# Altium PCB STM32_DEVBOARD_V1.1.PcbDoc (part 1 of 2)
Units mm, origin at the board's own origin, x right, y up, seen from the top; angles counter-clockwise.
Board outline 38.6 x 103 mm, 4 copper layers (Top Layer, Mid-Layer 1, Mid-Layer 2, Bottom Layer); 59 components, 115 nets, 379 pads, 250 vias.
Unrouted connection lines stored in the file: 6.
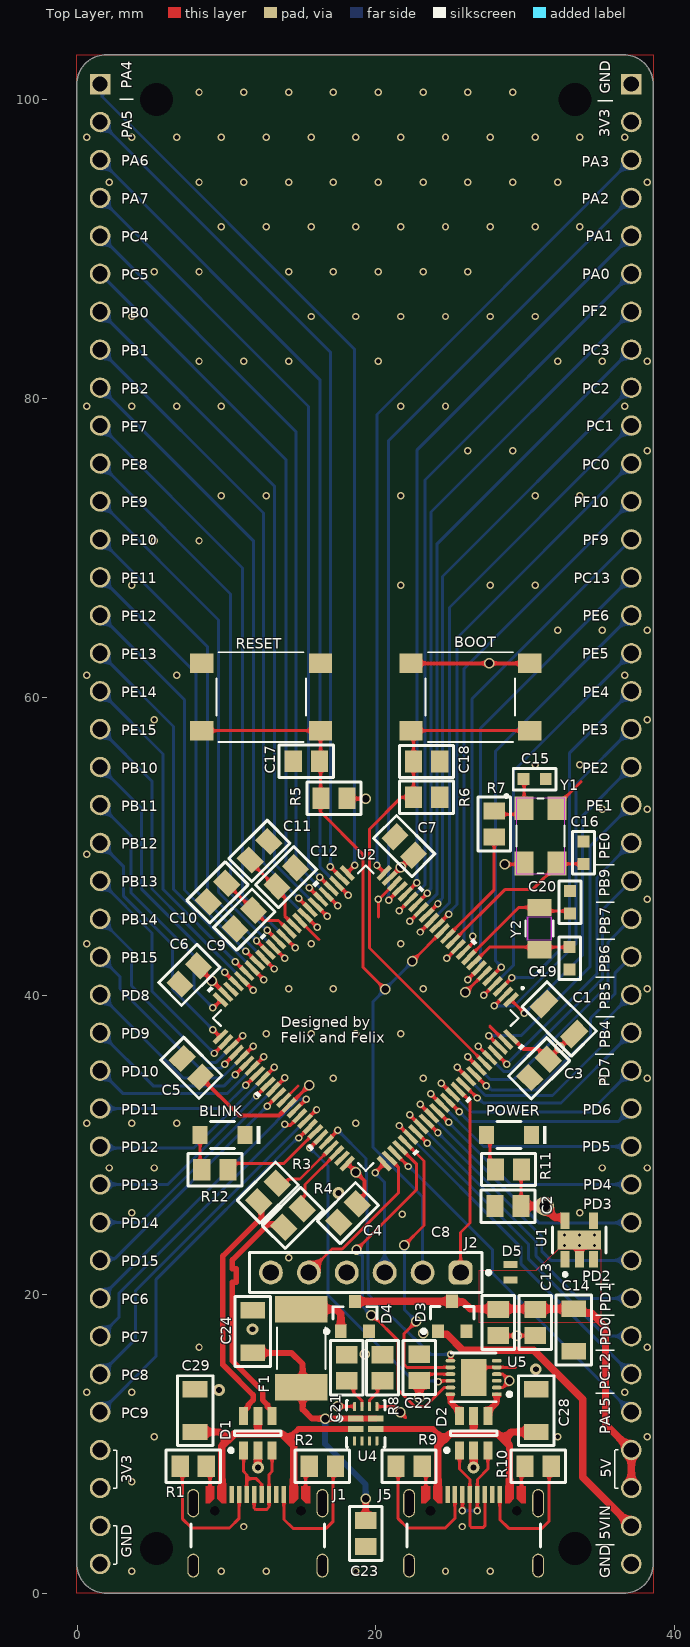
[diagram p0: Top Layer view]
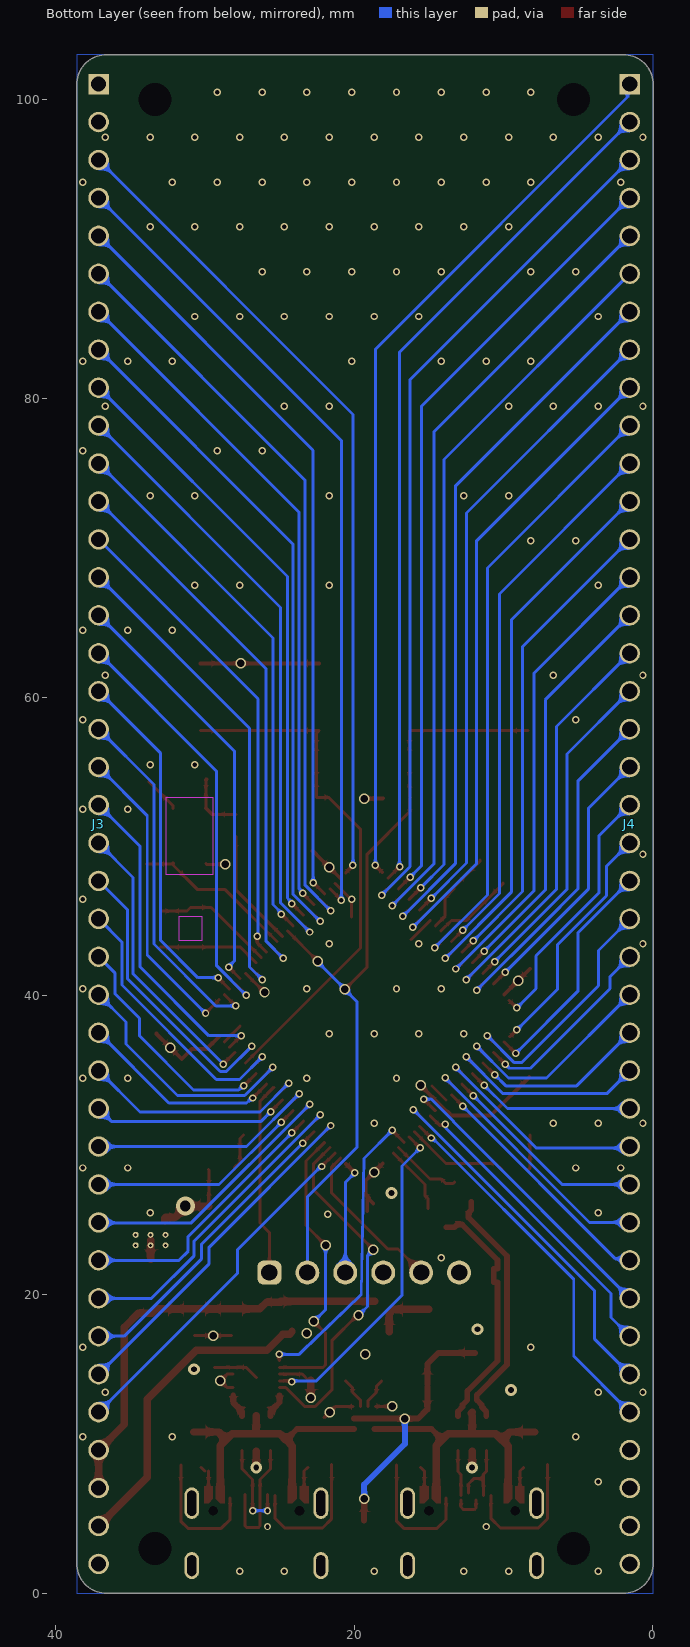
[diagram p1: Bottom Layer view, seen from below]
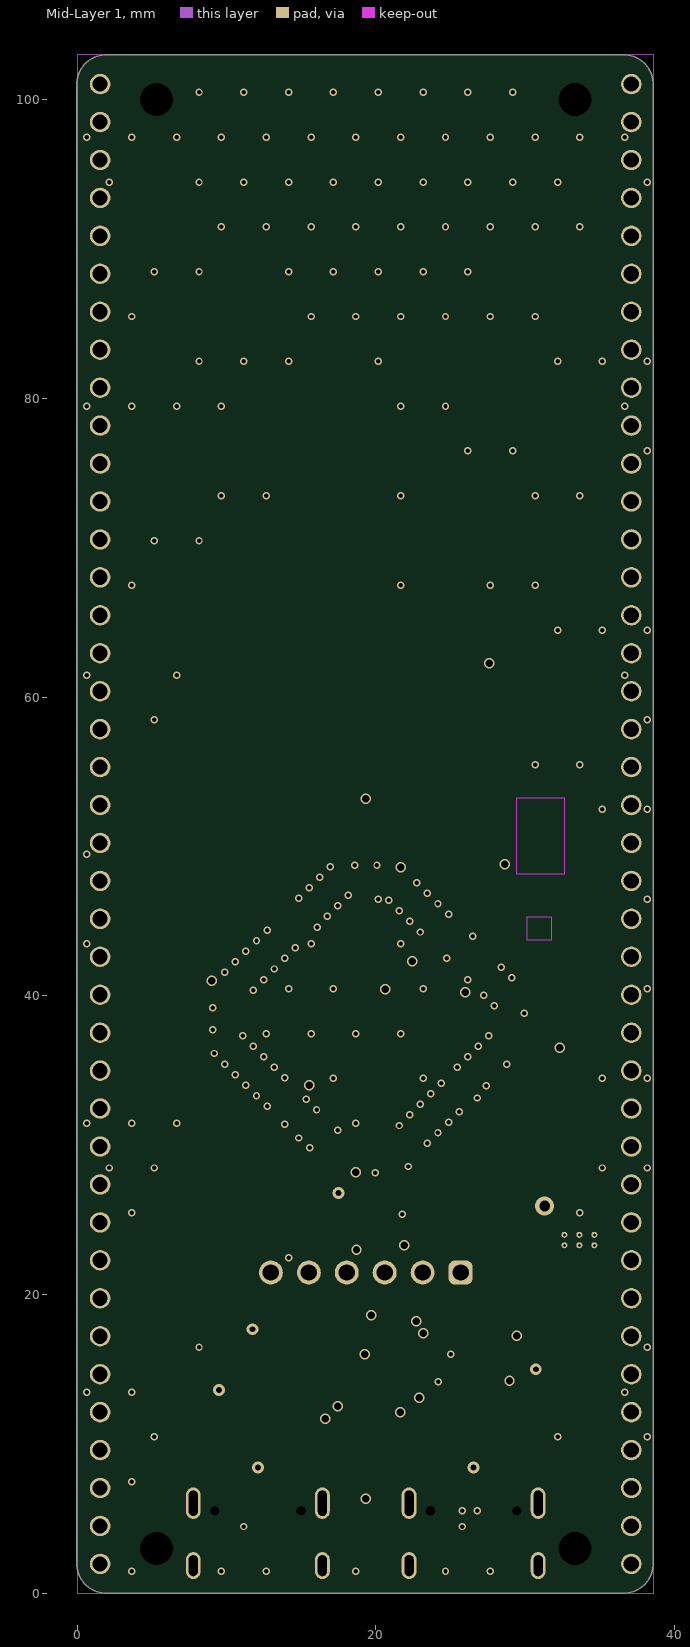
[diagram p2: Mid-Layer 1]
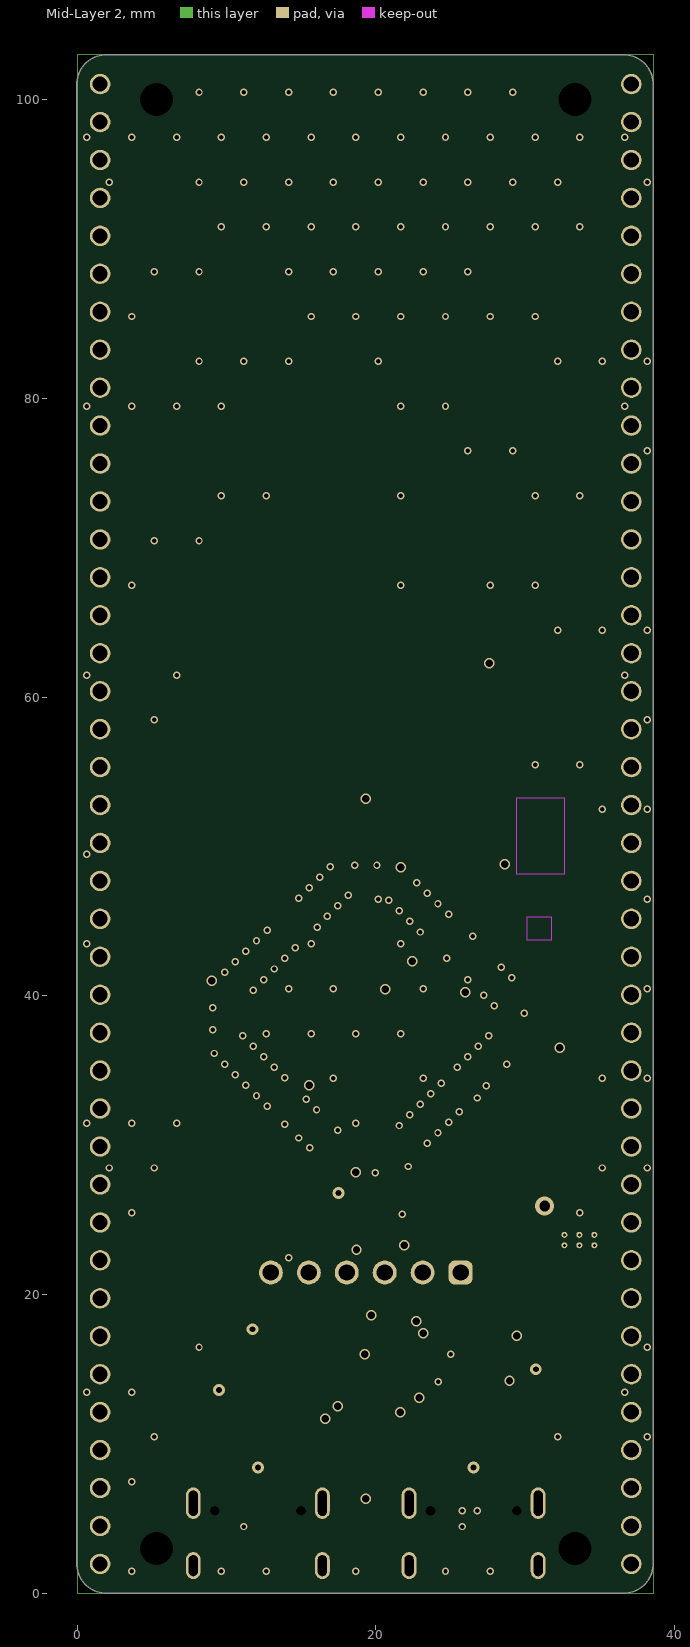
[diagram p3: Mid-Layer 2]

## Layer stack, top to bottom
Top Solder: solder mask 0.0102, Solder Resist, Dk 3.5
Top Layer: signal copper 0.0356
Dielectric 1: dielectric 0.32, FR-4, Dk 4.8
Mid-Layer 1: signal copper 0.0356
Dielectric2: dielectric 0.32, FR-4, Dk 4.8
Mid-Layer 2: signal copper 0.0356
Dielectric3: dielectric 0.32, FR-4, Dk 4.8
Bottom Layer: signal copper 0.0356
Bottom Solder: solder mask 0.0102, Solder Resist, Dk 3.5

## Board outline
-0.033,2 ccw(c1.967,2) 1.967,0 36.567,0 ccw(c36.567,2) 38.567,2 38.567,101 ccw(c36.567,101) 36.567,103 1.967,103 ccw(c1.967,101) -0.033,101

## Design rules (kind name [scope] priority, off if disabled: settings)
AssemblyTestPointUsage [All] p1: isadvanced=TRUE
AssemblyTestpoint [All] p1: isadvanced=TRUE testpointundercomponent=TRUE minsize=1.016 maxsize=2.54 preferedsize=1.524 minholesize=0 maxholesize=1.016 preferedholesize=0.813 testpointgrid=0.025 usegrid=TRUE gridtolerance=0 allowsidetop=TRUE allowsidebottom=TRUE
BoardOutlineClearance BoardOutlineClearance_1 [All] p1: isadvanced=TRUE gap=0.1 ignorepadtopadclearanceinfootprint=FALSE
Clearance Clearance_1 [(ExistsOnLayer('Mid-Layer 1') Or ExistsOnLayer('Mid-Layer 2')) vs (ExistsOnLayer('Mid-Layer 1') Or ExistsOnLayer('Mid-Layer 2'))] p1: gap=0.15 ignorepadtopadclearanceinfootprint=FALSE sourcerule=43 cellrowname=All cellrowtype=0 cellcolname=All cellcoltype=0 innerlayers=TRUE
Clearance Clearance_2 [(ExistsOnLayer('Top Layer') Or ExistsOnLayer('Bottom Layer')) vs (ExistsOnLayer('Top Layer') Or ExistsOnLayer('Bottom Layer'))] p2: gap=0.15 ignorepadtopadclearanceinfootprint=FALSE sourcerule=43 cellrowname=All cellrowtype=0 cellcolname=All cellcoltype=0 outerlayers=TRUE
Clearance [All] p3: gap=0.254 ignorepadtopadclearanceinfootprint=FALSE ismatrix=TRUE
ComponentClearance [All] p1: isadvanced=TRUE gap=0.254 collisioncheckmode=3 verticalgap=0.254 showdistances=FALSE
DiffPairsRouting [All] p1: maxlimit=0.254 minlimit=0.254 mostfreqgap=0.254 toplayer_minwidth=0.381 toplayer_maxwidth=0.381 toplayer_prefwidth=0.381 midlayer1_minwidth=0.381 midlayer1_maxwidth=0.381 midlayer1_prefwidth=0.381 midlayer2_minwidth=0.381 midlayer2_maxwidth=0.381 midlayer2_prefwidth=0.381 bottomlayer_minwidth=0.381 bottomlayer_maxwidth=0.381 bottomlayer_prefwidth=0.381 maxuncoupledlength=12.7
FabricationTestPointUsage [All] p1: isadvanced=TRUE valid=0 allowmultiple=FALSE
FabricationTestpoint [All] p1: isadvanced=TRUE side=3 testpointundercomponent=TRUE minsize=1.016 maxsize=2.54 preferedsize=1.524 minholesize=0 maxholesize=1.016 preferedholesize=0.813 testpointgrid=0.025 allowsidetop=TRUE allowsidebottom=TRUE usegrid=TRUE gridtolerance=0
FanoutControl Fanout_BGA [IsBGA] p1: isadvanced=TRUE bgadir=Out bgaviamode=Centered fanoutstyle=Auto fanoutdirection=Alternating viagrid=0.025 // Fanout_BGA (Default Rule)
FanoutControl Fanout_LCC [IsLCC] p2: isadvanced=TRUE bgadir=Out bgaviamode=Centered fanoutstyle=Auto fanoutdirection=Alternating viagrid=0.025 // Fanout_LCC (Default Rule)
FanoutControl Fanout_SOIC [IsSOIC] p3: isadvanced=TRUE bgadir=Out bgaviamode=Centered fanoutstyle=Auto fanoutdirection=Alternating viagrid=0.025 // Fanout_SOIC (Default Rule)
FanoutControl Fanout_Small [(CompPinCount < 5)] p4: isadvanced=TRUE bgadir=Out bgaviamode=Centered fanoutstyle=Auto fanoutdirection=OutThenIn viagrid=0.025 // Fanout_Small (Default Rule)
FanoutControl Fanout_Default [All] p5: isadvanced=TRUE bgadir=Out bgaviamode=Centered fanoutstyle=Auto fanoutdirection=Alternating viagrid=0.025 // Fanout_Default (Default Rule)
Height [All] p1: isadvanced=TRUE minheight=0 maxheight=25.4 prefheight=12.7
HoleSize [All] p1: isadvanced=TRUE absolutevalues=TRUE maxlimit=2.54 minlimit=0.025 maxpercent=80.000 minpercent=20.000
HoleToHoleClearance [All] p1: isadvanced=TRUE gap=0.254 allowstackedmicrovias=TRUE
LayerPairs [All] p1: isadvanced=TRUE enforce=TRUE
MinimumSolderMaskSliver [All] p1: isadvanced=TRUE minsoldermaskwidth=0.254
NetAntennae [All] p1: isadvanced=TRUE netantennaetolerance=0
PasteMaskExpansion [All] p1: isadvanced=TRUE expansion=0
PlaneClearance [All] p1: isadvanced=TRUE clearance=0.508
PlaneConnect [All] p1: isadvanced=TRUE planeconnectstyle=Relief reliefexpansion=0.508 reliefentries=4 reliefconductorwidth=0.254 reliefairgap=0.254
PolygonConnect PolygonConnectStyle_1 [InNet('+5')] p1: isadvanced=TRUE connectstyle=Direct reliefconductorwidth=0.254 reliefentries=2 polygonreliefangle="0 Angle" airgapwidth=0.254
PolygonConnect [All] p2: thpad.connectstyle=Relief thpad.reliefconductorwidth=0.254 thpad.reliefentries=4 thpad.polygonreliefangle="90 Angle" thpad.airgapwidth=0.254 smdpad.connectstyle=Relief smdpad.reliefconductorwidth=0.254 smdpad.reliefentries=4 smdpad.polygonreliefangle="90 Angle" smdpad.airgapwidth=0.254 via.connectstyle=Direct via.reliefconductorwidth=0.254 via.reliefentries=4 via.polygonreliefangle="90 Angle" via.airgapwidth=0.254
RoutingCorners [All] p1: isadvanced=TRUE cornerstyle=45-Degree minsetback=2.54 maxsetback=2.54
RoutingPriority [All] p1: isadvanced=TRUE routingpriority=0
RoutingVias [All] p1: holewidth=0.711 width=1.27 viastyle="Through Hole" minholewidth=0.711 minwidth=1.27 maxholewidth=0.711 maxwidth=1.27
ShortCircuit [All] p1: isadvanced=TRUE allowed=FALSE
SilkToSilkClearance [All] p1: isadvanced=TRUE silktosilkclearance=0.254
SilkToSolderMaskClearance [IsPad] p1: isadvanced=TRUE minsilkscreentomaskgap=0.254 clearancetoexposedcopper=TRUE
SolderMaskExpansion [All] p1: isadvanced=TRUE expansion=0 istentingtop=FALSE
SupplyNets "Schematic Supply Nets_3" [InNet('5VIN')] p1: voltage=0.000
SupplyNets "Schematic Supply Nets_2" [InNet('+5')] p2: isadvanced=TRUE voltage=0.000
SupplyNets "Schematic Supply Nets_1" [InNet('+3.3')] p3: isadvanced=TRUE voltage=0.000
SupplyNets "Schematic Supply Nets" [InNet('GND')] p4: isadvanced=TRUE voltage=0.000
UnRoutedNet [All] p1: isadvanced=TRUE
UnpouredPolygon [All] p1: isadvanced=TRUE
Width MaxMinWidth_1 [InxNetClass('All xNets')] p1: maxlimit=0.5 minlimit=0.2 preferedwidth=0.2 minimp=50.000000 maximp=50.000000 favimp=50.000000
Width [All] p2: maxlimit=0.254 minlimit=0.254 preferedwidth=0.254
3 further rules are at their usual default settings.

## Classes and differential pairs
differential pair class USB_DIFF: USB_DIFF
component class POWER: BLINK C1 C2 C3 C4 C5 C6 C7 C8 C9 C10 C11 C12 C13 C14 C21 C22 C23 C24 C28 C29 D1 D2 D3 D4 D5 F1 J1 J5 POWER R1 R2 R8 R9 R10 R11 R12 U1 U4 U5
component class Main: BOOT C15 C16 C17 C18 C19 C20 J2 J3 J4 R3 R4 R5 R6 R7 RESET U2 Y1 Y2
differential pair USB_DIFF: +USB_DIFF_P -USB_DIFF_N
differential pair USB_2_DIFF: +USB_2_DIFF_P -USB_2_DIFF_N
differential pair D_2: +D_2_P -D_2_N
differential pair D: +D_P -D_N

## Components (designator, comment, footprint, x,y, rotation, side; value= is the part's Value field where it differs from the comment)
BLINK "LED_1206_GREEN" "WL-SMRW_1205_normal use" 9.729,30.683 r180 top
BOOT "PTS645SH43SMTR92 LFS" "PTS645SH43SMTR92 LFS" 26.317,60 r0 top locked
C1 "C_1206_4u70_X7R_25V" SMD_1026_footprint 32.267,38.45 r315 top
C2 "C_0805_100n0_X7R" SMD_0805_footprint 28.842,25.925 r0 top
C3 "C_0805_100n0_X7R" SMD_0805_footprint 30.917,35.141 r45 top
C4 "C_0805_100n0_X7R" SMD_0805_footprint 18.123,25.456 r45 top
C5 "C_0805_100n0_X7R" SMD_0805_footprint 7.645,35.179 r315 top
C6 "C_0805_100n0_X7R" SMD_0805_footprint 7.508,41.4 r45 top
C7 "C_0805_1u00_X7R_16V" SMD_0805_footprint 21.892,50.025 r315 top
C8 "C_0805_1u00_X7R_16V" SMD_0805_footprint 28.192,18.125 r90 top
C9 "C_0805_1u00_X7R_16V" SMD_0805_footprint 11.192,45.104 r45 top
C10 "C_0805_10n00_X7R_50V" SMD_0805_footprint 9.395,46.918 r45 top
C11 "C_0805_100n0_X7R" SMD_0805_footprint 12.2,49.703 r225 top
C12 "C_0805_1u00_X7R_16V" SMD_0805_footprint 13.99,47.944 r225 top
C13 "C_0805_100n0_X7R" SMD_0805_footprint 30.667,18.125 r90 top
C14 "C_1206_10u0_X7R_25V" SMD_1026_footprint 33.242,17.625 r90 top
C15 "C_0603_10pF_50V" WCAP-CSGP_0603_L1.6W0.8H0.8_Reflow 30.617,54.502 r180 top
C16 "C_0603_10pF_50V" WCAP-CSGP_0603_L1.6W0.8H0.8_Reflow 33.891,49.577 r270 top
C17 "C_0805_100n0_X7R" SMD_0805_footprint 15.342,55.7 r0 top
C18 "C_0805_100n0_X7R" SMD_0805_footprint 23.392,55.685 r180 top
C19 "C_0603_4pF_50V" WCAP-CSGP_0603_L1.6W0.8H0.8_Reflow 32.967,42.525 r90 top
C20 "C_0603_4pF_50V" WCAP-CSGP_0603_L1.6W0.8H0.8_Reflow 32.992,46.25 r270 top
C21 "C_0805_1u00_X7R_16V" SMD_0805_footprint 18.042,15.1 r270 top
C22 "C_0805_100n0_X7R" SMD_0805_footprint 22.897,15.125 r90 top
C23 "C_0805_100n0_X7R" SMD_0805_footprint 19.317,4 r90 top
C24 "C_1206_10u0_X7R_25V" SMD_1026_footprint 11.765,17.525 r270 top
C28 "C_1206_10u0_X7R_25V" SMD_1026_footprint 30.742,12.225 r270 top
C29 "C_1206_10u0_X7R_25V" SMD_1026_footprint 7.892,12.225 r270 top
D1 "USBLC6-2SC6" SOT23-6L_V 12.096,10.725 r90 top
D2 "USBLC6-2SC6" SOT23-6L_V 26.546,10.725 r90 top
D3 "BAS16LT3G" ONSC-SOT-23-3-318-08_V 25.102,18.543 r90 top
D4 "BAS16LT3G" ONSC-SOT-23-3-318-08_V 18.596,18.534 r90 top
D5 "D5V0H1U2LP1610-7" D5V0H1U2LP1610-7 29,21.5 r90 top
F1 "0ZCG0075FF2C" 0ZCG0075FF2C 14.992,16.4 r270 top
J1 "629722000214" 629722000214 12.092,3 r0 top locked
J2 "THT 1-Row Vertical Pin Header, 6 Pins, Pitch 2.54mm" 61300611121 19.317,21.475 r180 top locked
J3 "THT 1-Row Vertical Pin Header, 40 Pins, Pitch 2.54mm" "THT 1-Row Vertical Pin Header, 40 Pins, Pitch 2.54mm" 37.097,51.5 r90 bottom locked
J4 "THT 1-Row Vertical Pin Header, 40 Pins, Pitch 2.54mm" "THT 1-Row Vertical Pin Header, 40 Pins, Pitch 2.54mm" 1.537,51.5 r90 bottom locked
J5 "629722000214" 629722000214 26.542,3 r0 top locked
POWER "LED_1206_GREEN" "WL-SMRW_1205_normal use" 28.905,30.683 r180 top
R1 "R_0805_5K10" SMD_0805_footprint 7.772,8.504 r180 top
R2 "R_0805_5K10" SMD_0805_footprint 16.412,8.504 r0 top
R3 "R_0805_27R0" SMD_0805_footprint 12.767,26.825 r45 top
R4 "R_0805_27R0" SMD_0805_footprint 14.442,25.128 r45 top
R5 "R_0805_10K_0.125W" SMD_0805_footprint 17.192,53.225 r0 top
R6 "R_0805_10K_0.125W" SMD_0805_footprint 23.392,53.285 r180 top
R7 "R_0805_1K80" SMD_0805_footprint 27.917,51.5 r90 top
R8 "R_0805_15K_0.125W" SMD_0805_footprint 20.442,15.1 r270 top
R9 "R_0805_5K10" SMD_0805_footprint 22.222,8.504 r180 top
R10 "R_0805_5K10" SMD_0805_footprint 30.862,8.504 r0 top
R11 "R_0805_360R0" SMD_0805_footprint 28.868,28.372 r180 top
R12 "R_0805_360R0" SMD_0805_footprint 9.22,28.346 r180 top
RESET "PTS645SH43SMTR92 LFS" "PTS645SH43SMTR92 LFS" 12.317,60 r180 top locked
U1 "PTLV75533PDYDR" DYD0005A-MFG 33.617,23.65 r90 top
U2 "STM32G431VBT6" LQFP100 19.317,38.5 r225 top locked
U4 "TPS2121RUXR" FP-RUX0012A-MFG 19.317,11.35 r0 top
U5 "FT234XD-R" FP-DFN-12-MFG 26.538,14.45 r180 top locked
Y1 "ECS-80-10-30B-CKM-TR" ECS-80-10-30B-CKM-TR 31.017,50.702 r270 top
Y2 "SC32S-7PF20PPM" SC32S-7PF20PPM-Footprint-1 30.817,43.656 r90 top value=7pF

## Footprints (in the part's own frame and the unit in brackets; to place one, negate y for a bottom-side part, rotate by r counter-clockwise, add the part's x,y. Pads: shape width x height; smd on the part's side, far side on the other; paste and mask are expansions set on the pad)
0ZCG0075FF2C [mm]
  rect 1.78x3.5 smd paste+0 mask+0.102: 1(-2.615,0) 2(2.615,0)
  silkscreen extent -1.4,-1.62 1.4,1.62, body extent -2.27,-1.62 2.27,1.62, height 0.7
61300611121 [mm] "Pin Header, pitch 2.54 mm, THT, Vertical, single row, 6p"
  rrect50% 1.6x1.6 hole 1.1: 1(-6.35,0)
  round 1.6 hole 1.1: 2(-3.81,0) 3(-1.27,0) 4(1.27,0) 5(3.81,0) 6(6.35,0)
  silkscreen extent -8.34,-1.35 7.77,1.35, body extent -7.62,-1.27 7.62,1.27, height 8.57
629722000214 [mm] "USB TYPE C VERTICAL PLUG"
  oval 0.8x1.9 / inner oval 1x2.1 / far side oval 1x2.1 hole 0.6 slot 1.7 at 90 deg paste-2539.97: 1(-4.32,3.035) 3(4.32,3.035)
  oval 0.8x1.6 / inner oval 1x1.8 / far side oval 1x1.8 hole 0.6 slot 1.4 at 90 deg paste-2539.97: 2(-4.32,-1.145) 4(4.32,-1.145)
  round 0.025 smd: A1/B12(-3.2,3.605) A4/B9(-2.4,3.605) A9/B4(2.4,3.605) A12/B1(3.2,3.605)
  rect 0.3x1.14 smd: A5(-1.25,3.605) A6(-0.25,3.605) A7(0.25,3.605) A8(1.25,3.605) B5(1.75,3.605) B6(0.75,3.605) B7(-0.75,3.605) B8(-1.75,3.605)
  round 0 hole 0.65 unplated: MH1(-2.89,2.535) MH2(2.89,2.535)
  Top Layer region: 3.5,3.035 3.2,3.035 2.9,3.335 2.9,4.175 3.5,4.175
  Top Layer region: -3.5,3.035 -3.2,3.035 -2.9,3.335 -2.9,4.175 -3.5,4.175
  Top Layer region: -2.1,3.035 -2.4,3.035 -2.7,3.335 -2.7,4.175 -2.1,4.175
  Top Layer region: 2.1,3.035 2.4,3.035 2.7,3.335 2.7,4.175 2.1,4.175
  silkscreen extent -4.47,0.11 4.47,1.65, body extent -4.79,-3.76 4.79,3.95, height 3.33
D5V0H1U2LP1610-7 [mil]
  rect 18x37 smd paste+0 mask+0: 1(-20.53,0) 2(20.53,0)
  body extent -33,-21 33,21, height 24
DYD0005A-MFG [mm]
  rect 1.1x0.6 smd: 1(-1.3,0.95) 2(-1.3,0) 3(-1.3,-0.95) 4(1.3,-0.95) 5(1.3,0.95)
  rect 1.3x2.9 smd paste-1.437 mask-1.435: EP(0,0)
  round 0.4 hole 0.2: EP_1(-0.35,1) EP_2(0.35,1) EP_3(-0.35,0) EP_4(0.35,0) EP_5(-0.35,-1) EP_6(0.35,-1)
  silkscreen extent -2.4,-1.8 0.87,1.8, body extent -1.4,-1.45 1.4,1.45, height 1.2
ECS-80-10-30B-CKM-TR [mm]
  rect 1.6x1.25 smd: 1(-1.85,-1.1) 2(1.85,-1.1) 3(1.85,1.1) 4(-1.85,1.1)
  silkscreen extent -2.77,-2.39 2.5,1.6, body extent -2.5,-1.6 2.5,1.6, height 0.85
FP-DFN-12-MFG [mm]
  rect 0.65x0.25 smd paste+0 mask+0: 1(-1.55,1.125)
  rrect100% 0.65x0.25 smd paste+0 mask+0: 2(-1.55,0.675) 3(-1.55,0.225) 4(-1.55,-0.225) 5(-1.55,-0.675) 6(-1.55,-1.125) 7(1.55,-1.125) 8(1.55,-0.675) 9(1.55,-0.225) 10(1.55,0.225) 11(1.55,0.675) 12(1.55,1.125)
  rect 1.7x2.5 smd paste+0 mask+0: 13(0,0)
  silkscreen extent -2.53,-1.63 1.5,1.63, body extent -1.97,-1.6 1.97,1.6, height 0.25
FP-RUX0012A-MFG [mm]
  rrect25% 1.05x0.4 smd paste+0 mask+0: 1(-0.675,0.35) 2(-0.675,-0.35) 7(0.675,-0.35) 8(0.675,0.35)
  rrect50% 0.2x0.6 smd paste+0 mask+0: 3(-0.75,-1.15) 4(-0.25,-1.15) 5(0.25,-1.15) 6(0.75,-1.15) 9(0.75,1.15) 10(0.25,1.15) 11(-0.25,1.15) 12(-0.75,1.15)
  silkscreen extent -1.87,-1.55 1.3,1.55, body extent -1.3,-1.55 1.3,1.55, height 0.25
LQFP100 [mil]
  rect 47x12 smd paste+0 mask+0: 1(-305.12,236.22) 2(-305.12,216.54) 3(-305.12,196.85) 4(-305.12,177.17) 5(-305.12,157.48) 6(-305.12,137.8) 7(-305.12,118.11) 8(-305.12,98.43) 9(-305.12,78.74) 10(-305.12,59.06) 11(-305.12,39.37) 12(-305.12,19.69) 13(-305.12,0) 14(-305.12,-19.69) 15(-305.12,-39.37) 16(-305.12,-59.06) 17(-305.12,-78.74) 18(-305.12,-98.43) 19(-305.12,-118.11) 20(-305.12,-137.8) 21(-305.12,-157.48) 22(-305.12,-177.17) 23(-305.12,-196.85) 24(-305.12,-216.54) 25(-305.12,-236.22) 51(305.12,-236.22) 52(305.12,-216.54) 53(305.12,-196.85) 54(305.12,-177.17) 55(305.12,-157.48) 56(305.12,-137.8) 57(305.12,-118.11) 58(305.12,-98.43) 59(305.12,-78.74) 60(305.12,-59.06) 61(305.12,-39.37) 62(305.12,-19.69) 63(305.12,0) 64(305.12,19.69) 65(305.12,39.37) 66(305.12,59.06) 67(305.12,78.74) 68(305.12,98.43) 69(305.12,118.11) 70(305.12,137.8) 71(305.12,157.48) 72(305.12,177.17) 73(305.12,196.85) 74(305.12,216.54) 75(305.12,236.22)
  rect 12x47 smd paste+0 mask+0: 26(-236.22,-305.12) 27(-216.54,-305.12) 28(-196.85,-305.12) 29(-177.17,-305.12) 30(-157.48,-305.12) 31(-137.8,-305.12) 32(-118.11,-305.12) 33(-98.43,-305.12) 34(-78.74,-305.12) 35(-59.06,-305.12) 36(-39.37,-305.12) 37(-19.69,-305.12) 38(0,-305.12) 39(19.69,-305.12) 40(39.37,-305.12) 41(59.06,-305.12) 42(78.74,-305.12) 43(98.43,-305.12) 44(118.11,-305.12) 45(137.8,-305.12) 46(157.48,-305.12) 47(177.17,-305.12) 48(196.85,-305.12) 49(216.54,-305.12) 50(236.22,-305.12) 76(236.22,305.12) 77(216.54,305.12) 78(196.85,305.12) 79(177.17,305.12) 80(157.48,305.12) 81(137.8,305.12) 82(118.11,305.12) 83(98.43,305.12) 84(78.74,305.12) 85(59.06,305.12) 86(39.37,305.12) 87(19.69,305.12) 88(0,305.12) 89(-19.69,305.12) 90(-39.37,305.12) 91(-59.06,305.12) 92(-78.74,305.12) 93(-98.43,305.12) 94(-118.11,305.12) 95(-137.8,305.12) 96(-157.48,305.12) 97(-177.17,305.12) 98(-196.85,305.12) 99(-216.54,305.12) 100(-236.22,305.12)
  silkscreen extent -351,-349 349,349, body extent -315,-315 315,315, height 63
ONSC-SOT-23-3-318-08_V [mm] "SOT23, 3-Leads, Body 2.92x1.3mm, Pitch 0.95mm"
  rect 0.9x0.8 smd: 1(-1,0.95) 2(-1,-0.95) 3(1,0)
  silkscreen extent -1.12,-1.46 0.65,2.02, body extent -0.65,-1.46 0.65,1.46, height 1.11
"PTS645SH43SMTR92 LFS" [mm]
  rect 1.55x1.3 smd: 1(-3.975,2.25) 2(3.975,2.25) 3(-3.975,-2.25) 4(3.975,-2.25)
  silkscreen extent -3,-3 3,3, body extent -4.5,-3 4.5,3, height 4.3
SC32S-7PF20PPM-Footprint-1 [mil]
  rect 45.78x63 smd paste+0 mask+0: 1(-22.89,-5) 2(88.89,-5)
  Top Layer keep-out region: 2,-34.5 2,24.5 64,24.5 64,-34.5
  Keep-Out Layer region: 2,-36.5 2,26.5 64,26.5 64,-36.5
  silkscreen extent -82,-42 54,32, body extent -32,-36 98,26, height 33
SMD_0805_footprint [mm] "2-Leads, Body 2.2x1.35mm, IPC Medium Density"
  rect 1.15x1.45 smd: 1(-0.875,0) 2(0.875,0)
  silkscreen extent -1.82,-1.08 1.82,1.09, body extent -1.1,-0.72 1.1,0.72, height 0.7
SMD_1026_footprint [mm] "Chip Resistor, 2-Leads, Body 3.20x1.60mm, IPC Medium Density"
  rect 1.1x1.65 smd: 1(-1.425,0) 2(1.425,0)
  silkscreen extent -2.34,-1.19 2.34,1.19, body extent -1.63,-0.82 1.62,0.82, height 0.7
SOT23-6L_V [mm] "SOT23, 6-Leads, Body 3.05x1.75mm, Pitch 0.95mm"
  rect 1.2x0.6 smd: 1(-1.15,0.95) 2(-1.15,0) 3(-1.15,-0.95) 4(1.15,-0.95) 5(1.15,0) 6(1.15,0.95)
  silkscreen extent -1.27,-1.55 0.15,1.92, body extent -1.6,-1.53 1.6,1.53, height 1.45
"THT 1-Row Vertical Pin Header, 40 Pins, Pitch 2.54mm" [mm]
  rect 1.37x1.37 / inner round 1.37 / far side rect 1.37x1.37 hole 1.02: 01(49.53,0)
  round 1.37 hole 1.02: 02(46.99,0) 03(44.45,0) 04(41.91,0) 05(39.37,0) 06(36.83,0) 07(34.29,0) 08(31.75,0) 09(29.21,0) 10(26.67,0) 11(24.13,0) 12(21.59,0) 13(19.05,0) 14(16.51,0) 15(13.97,0) 16(11.43,0) 17(8.89,0) 18(6.35,0) 19(3.81,0) 20(1.27,0) 21(-1.27,0) 22(-3.81,0) 23(-6.35,0) 24(-8.89,0) 25(-11.43,0) 26(-13.97,0) 27(-16.51,0) 28(-19.05,0) 29(-21.59,0) 30(-24.13,0) 31(-26.67,0) 32(-29.21,0) 33(-31.75,0) 34(-34.29,0) 35(-36.83,0) 36(-39.37,0) 37(-41.91,0) 38(-44.45,0) 39(-46.99,0) 40(-49.53,0)
  body extent -50.8,-1.27 50.8,1.27, height 8.64
WCAP-CSGP_0603_L1.6W0.8H0.8_Reflow [mm] "Ceramic Capacitors, body 1.6x0.8mm"
  rect 0.8x0.8 smd: 1(-0.75,0) 2(0.75,0)
  silkscreen extent -1.43,-0.72 1.43,0.72, body extent -0.8,-0.4 0.8,0.4, height 0.8
"WL-SMRW_1205_normal use" [mm] "SMD Mono-color Reverse mount Waterclear, body 3.2x1.2mm"
  rect 1x1.2 smd: 1(-1.5,0) 2(1.5,0)
  silkscreen extent -2.53,-0.9 0.8,0.9, body extent -1.6,-0.6 1.6,0.6, height 1.1

## Part data
BLINK POWER: library part CMP-00090-5, "LED, SMD, 1206, green", Displayed Value="LED green", Manufacturer="Würth Elektronik", Manufacturer Part Number=156120GS75000
BOOT RESET: library part CMP-00294-6, "SWITCH TACTILE SPST-NO 0.05A 12V", Manufacturer=E-Switch, Manufacturer Part Number=TL3301NF160QG-KR, Datasheet=chrome-extension://efaidnbmnnnibpcajpcglclefindmkaj/https://configured-product-images.s3.amazonaws.com/Datasheets/TL3301.pdf
C1: library part CMP-00046-7, "Ceramic Capacitor, Multilayer, Ceramic, 25V, 10% +Tol, 10% -Tol, X7R, 15% TC, 4.7uF, Surface Mount, 1206", Displayed Value=4.7uF, Manufacturer="AVX Kyocera", Manufacturer Part Number=12063C475KAT4A
C2 C3 C4 C5 C6 C11 C13 C22 C23: library part CMP-00043-7, "Ceramic Capacitor, Multilayer, Ceramic, 50V, 10% +Tol, 10% -Tol, X7R, 15% TC, 0.1uF, Surface Mount, 0805", Displayed Value=100nF, Manufacturer="Würth Elektronik", Manufacturer Part Number=885012207098
C7 C8 C9 C12 C21: library part CMP-00037-7, "Ceramic Capacitor 1uF 16V 10% X7R SMD 0805", Displayed Value=1uF, Manufacturer="multicomp Pro", Manufacturer Part Number=MC0805B105K160CT
C10: library part CMP-035-000003-2, "Multilayer Ceramic Capacitor 0.01uF 0805", Displayed Value=10nF, Manufacturer="Würth Elektronik", Manufacturer Part Number="8850 1220 7092"
C14 C24 C28 C29: library part CMP-00031-9, "10μF ±10% 25V Ceramic Capacitor X7R 1206 (3216 Metric)", Displayed Value=10uF, Manufacturer="Würth Elektronik", Manufacturer Part Number=885012208069
C15 C16: library part C_0603_-1, "CAP CER 10PF 50V C0G/NP0 0603 / 10 pF ±5% 50V Ceramic Capacitor C0G, NP0 0603 (1608 Metric)", Displayed Value=10pF, Manufacturer=Kemet, Manufacturer Part Number=C0603C100J5GACTU
C17 C18: library part CMP-00043-7, "Ceramic Capacitor, Multilayer, Ceramic, 50V, 10% +Tol, 10% -Tol, X7R, 15% TC, 0.1uF, Surface Mount, 0805", Displayed Value=100nF, Manufacturer Part Number=885012207098, Manufacturer="Würth Elektronik"
C19 C20: library part CMP-00285-1, "CAP CER 4PF 50V C0G/NP0 0603 / 10 pF ±5% 50V Ceramic Capacitor C0G, NP0 0603 (1608 Metric)", Displayed Value=4pF, Manufacturer=Yageo, Manufacturer Part Number=CC0603CRNPO9BN4R0
D1 D2: library part CMP-060-000002-2, "5A 17V 6V Unidirectional 5.25V SOT-23-6L ESD and Surge Protection (TVS/ESD) ROHS", Displayed Value=USBLC6, Manufacturer="ST Microelectronics", Manufacturer Part Number=USBLC6-2SC6
D3 D4: library part CMP-005-000000-1, "Rectifier Diode Small Signal Switching 0.2A 6ns 3-Pin SOT-23 T/R", Displayed Value=BAS16, Manufacturer=Onsemi, Manufacturer Part Number=BAS16LT3G
D5: library part CMP-00306-1, "TVS Diode", Displayed Value=5.5v, Manufacturer="Diodes Incorporated", Datasheet=chrome-extension://efaidnbmnnnibpcajpcglclefindmkaj/https://www.diodes.com/assets/Datasheets/D5V0H1U2LP1610.pdf, Manufacturer Part Number=D5V0H1U2LP1610-7
F1: library part CMP-00289-1, "Polymérique PTC Resettable Fuse 16V 750 mA Ih Montage en surface 1812", Displayed Value="750 mA", Manufacturer="Bel Fuse Inc.", Datasheet=https://www.belfuse.com/media/datasheets/products/circuit-protection/ds-cp-0zcg-series.pdf, Manufacturer Part Number=0ZCG0075FF2C
J1 J5: library part CMP-00007-14, "Usb Conn, R/a, Type C 2.0, Rcpt, 16POS Rohs Compliant: Yes", Manufacturer="Würth Elektronik", Datasheet=https://www.we-online.com/components/products/datasheet/629722000214.pdf, Manufacturer Part Number=629722000214
J2: library part CMP-00286-1, "THT Vertical Pin Header WR-PHD, Pitch 2.54mm, Single Row, 6 Pins", Manufacturer Part Number="613 006 11121", Manufacturer="Würth Elektronik"
J3 J4: library part CMP-00295-3, "THT Vertical Pin Header WR-PHD, Pitch 2.54mm, Single Row, 40 Pins", Manufacturer="Würth Elektronik", Manufacturer Part Number="613 008 11121"
R1 R2 R9 R10: library part CMP-067-000002-3, "Res Thick Film 0805 5.1K Ohm 1% 1/8W ±100ppm/°C Molded SMD Punched Carrier T/R", Displayed Value=5K1, Manufacturer=Panasonic, Manufacturer Part Number=ERJ-6ENF5101V
R3 R4: library part CMP-001-001-2, "Res Thick Film 0805 27 Ohm 1% 0.125W ±100ppm/°C Molded SMD Punched Carrier T/R", Displayed Value=27R, Manufacturer=Panasonic, Manufacturer Part Number=CRCW080527R0JNTA
R5 R6: library part CMP-067-000001-3, "Res Thick Film 0805 10K Ohm 1% 0.125W(1/8W) ±100ppm/C Pad SMD Automotive T/R", Displayed Value=10K, Manufacturer Part Number=ERJ-6ENF1002V, Manufacturer=Panasonic
R7: library part CMP-00088-2, "Resistor 1K8, SMD 0805, 1% 0.125W", Displayed Value=1K8, Manufacturer=Panasonic, Manufacturer Part Number=ERJ-6ENF1801V
R8: library part CMP-00139-1, "Res Thick Film 0805 1.5K Ohm 1% 0.125W(1/8W) +/-100ppm/C Molded SMD Automotive Punched T/R", Displayed Value=15K, Manufacturer=Panasonic, Manufacturer Part Number=ERJ-6ENF1501V
R11 R12: library part CMP-00089-2, "Res Thick Film 0805 360 Ohm 1% 0.125W ±100ppm/°C Molded SMD Punched Carrier T/R", Displayed Value=360R, Manufacturer=Panasonic, Manufacturer Part Number=ERJ-6ENF3600V
U1: library part CMP-001-0003-4, "500-mA high-PSRR low-IQ low-dropout voltage regulator with enable 5-SOT-23 -40 to 125", Manufacturer="Texas Instruments", Displayed Value=PTLV75533PDYDR, Manufacturer Part Number=PTLV75533PDYDR
U2: library part CMP-00274-1, "Microcontroller 32-Bit ARM Cortex-M4 RISC 128KB Flash 1.71V to 3.6V 100-Pin LQFP", Case/Package=LFQFP, Clock Frequency=48MHz, Frequency=170MHz, Max Operating Temperature=85°C, Max Supply Current=29mA, Max Supply Voltage=3.6V, Min Operating Temperature=-40°C, Min Supply Voltage=1.71V, Operating Supply Voltage=3V, ADC Channels (Resolution)="23-Ch 12-Bit", China RoHS=Compliant, Core Architecture="ARM Cortex-M4", Country of Origin="Mainland China, Malaysia, Philippines, Taiwan", DAC Channels (Resolution)="4-Ch 12-Bit", EEPROM Memory Size=0B, Export Control Classification Number (ECCN) Code=3A991.A.2, Flash Memory Size=128kB, Harmonized Tariff Schedule (HTS) Code=8542.31.00.25, Height - Seated (Max)=1.6mm, Interface="UART, USB", Introduction Date=2019-10-29, Length=14mm, Lifecycle Status=Production, Memory Format=FLASH, Number of A/D Converters=2, Number of Channels=23, Number of D/A Converters=2, Number of I2C Channels=3, Number of I/Os=6, Number of Interrupts=16, Number of SPI Channels=3, Number of Terminals=100, Number of Timers/Counters=12, Number of UART Channels=1, Number of USART Channels=3, Peripherals=POR, RAM Size=32kB, REACH SVHC=Yes, RoHS=Compliant, Terminal Pitch=500µm, Width=14mm
U4: library part CMP-00297-1, "2.7-V to 22-V, 56-mΩ, 4.5-A, power mux with seamless switchover 12-VQFN-HR -40 to 125"
U5: library part CMP-00296-1, "Tape & Reel (TR) 2006 UART USB 2.0 interface controller 2.97V~5.5V 800mum 8mA 3Mbps", Ambient Temperature Range High=85°C, Case/Package=DFN, Clock Frequency=12MHz, Max Supply Current=8.3mA, Max Supply Voltage=5.5V, Min Operating Temperature=-40°C, Min Supply Voltage=2.97V, Nominal Supply Current=8mA, Operating Supply Voltage=5V, Temperature Grade=Industrial, Data Rate=60Mbps, Height=800µm, Height - Seated (Max)=800µm, Interface="UART, USB", Lead Free="Lead Free", Length=3mm, Lifecycle Status=Production, Max Operating Temperature=85°C, Mounting Technology="Surface Mount", Number of Ports=1, Number of Terminals=12, Number of Transceivers=1, Operating Supply Current=8mA, Pins=12, REACH SVHC=Yes, RoHS=Compliant, Schedule B="8542390000, 8542390000", Terminal Pitch=450µm, USB Standard="USB 2.0", Width=3mm
Y1: library part CMP-00281-2, "Crystal, Standard, 8 MHz, SMD, 5mm x 3.2mm x 0.85mm, 10 ppm, 10 pF, 10 ppm, ECX-53B", Frequency=8MHz, Frequency Stability=10ppm, Frequency Tolerance=0.001%, Load Capacitance=10pF, Max Operating Temperature=70°C, Min Operating Temperature=-20°C, Country of Origin="South Korea, Taiwan", ESR=100Ω, Introduction Date=2018-05-11, Lifecycle Status=Production, Mounting Technology="Surface Mount", REACH SVHC=Yes, RoHS=Compliant
Y2: library part CMP-00293-1, "Crystal 0.032768MHz ±20ppm (Tol) 7pF FUND 70000Ohm 2-Pin SMD T/R", Case/Package=SMD/SMT, ESR (Equivalent Series Resistance)=70kΩ, Frequency=32.768kHz, Frequency Tolerance=0.002%, Load Capacitance=7pF, Max Operating Temperature=85°C, Min Operating Temperature=-40°C, Height=838.2µm, Length=3.2004mm, Mounting Technology="Surface Mount", Packaging="Tape & Reel (TR)", RoHS=Compliant, Schedule B="8541600025, 8541600025", Width=1.4986mm

## Free pads (board coordinates)
  round 0 hole 2.2: 10(5.317,3) 10(5.317,100) 10(33.317,3) 10(33.317,100)

## Via types
v1: diameter 0.5, hole 0.3, Top Layer to Bottom Layer, tented both sides, 219 vias
v2: diameter 0.7, hole 0.5, Top Layer to Bottom Layer, tented both sides, 24 vias
v3: diameter 0.8, hole 0.4, Top Layer to Bottom Layer, tented both sides, 6 vias
v4: diameter 1.27, hole 0.711, Top Layer to Bottom Layer, tented both sides, 1 vias

## Nets (pads, with @x,y where several pads share a name; then routed paths per layer and width w, separated by ;. In a path a pad name is that pad's centre, name@x,y a point inside that pad or via, vN(x,y) a via of type N, cw(c..) or ccw(c..) an arc to the next point about the centre after c; other vN are vias at no path point)
5VIN: D3.1 J3.39 | length 21.7
  Top Layer w0.2: D3.1@24.418,17.194 24.714,17.194
  Top Layer w0.5: D3.1@24.152,17.543 24.152,17.493 24.302,17.343 24.757,17.343 25.825,16.275 30.556,16.275 33.831,13 33.831,7.776 J3.39@37.097,4.51
+3.3: BOOT.1 BOOT.2 C1.2 C2.2 C3.2 C4.2 C5.2 C6.2 C7.2 C22.1 J2.6 J3.02 J4.37 J4.38 R5.2 R11.1 U1.5 U2.6 U2.24 U2.49 U2.64 U2.75 U2.100 U5.2 U5.4 U5.9 | length 46.7
  Top Layer w0.2: C7.2@22.511,49.406 22.511,49.442 22.511,49.524 C7.2@22.713,49.726 ; C22.1@23.042,14.25 23.467,14.675 U5.9@24.988,14.675 ; v2@26.017,40.25 U2.6@27.272,41.505 ; U5.2@28.088,13.775 28.492,13.775 v2(28.942,14.225) 28.492,14.675 U5.4@28.088,14.675 ; C2.2@29.717,25.925 29.717,28.345 R11.1@29.743,28.372
  Top Layer w0.254: C6.2@8.228,41.811 v2(9.017,41.022) U2.49@9.948,40.091 ; C5.2@8.264,34.56 10.846,31.979 13.503,31.979 U2.64@14.19,32.666 v2(15.54,34.016) ; R5.2@18.067,53.225 18.092,53.2 v2(19.317,53.2) ; U2.75@18.08,28.777 19.242,27.615 19.242,26.717 18.988,26.463 19.034,26.417 C4.2@18.717,26.1 ; C4.2@19.117,25.6 C4.2@19.117,26.334 ; U2.24@20.908,47.869 20.923,47.869 21.657,48.603 v2(21.672,48.603) 22.511,49.442 22.769,49.7 C7.2@22.789,49.7 ; BOOT.1@22.342,62.25 v2(27.572,62.25) BOOT.2@30.292,62.25 ; U2.100@29.04,37.263 29.871,36.432 30.864,36.432 C3.2@31.536,35.76 ; C3.2@31.536,35.769 v2(32.292,36.525) 33.215,37.448 C1.2@33.215,37.492
  Top Layer w0.5: C22.1@22.897,14.25 22.903,14.244 22.903,13.106 v2(22.909,13.1) ; C2.2@29.717,25.925 v4(31.292,25.925) 31.292,25.841 31.97,25.164 32.617,25.164 32.667,25.114 U1.5@32.667,24.95
  other v2: 18.661,28.196 25.992,40.25
+5: C8.2 C13.2 C14.2 D3.3 D4.3 D5.1 J3.37 J3.38 U1.1 U1.3 | length 28.9
  Top Layer w0.5: D4.3@18.605,19.543 D3.3@24.902,19.543 ; D3.3@24.902,19.5 25.84,19.5 26.3,19.04 33.242,19.04 33.532,18.75 34.442,18.75 35.367,17.825 35.367,11.32 J3.37@37.097,9.59 J3.38@37.097,7.05
BOOT0: BOOT.3 BOOT.4 C18.2 R6.2 U2.95 | length 35.2
  Top Layer w0.2: U2.95@27.272,35.495 19.571,43.196 19.571,51.154 21.702,53.285 R6.2@22.517,53.285 C18.2@22.517,55.685 22.517,57.575 BOOT.3@22.342,57.75 BOOT.4@30.292,57.75
CTS: U2.79 U5.11 | length 24.1
  Top Layer w0.2: v2(18.7,23) 22.727,27.027 22.727,28.726 U2.79@21.615,29.838 ; v2(19.7,18.6) 19.8,18.6 21.491,16.909 21.491,13.609 22.6,12.5 23.3,12.5 24.573,13.773 24.986,13.773 U5.11@24.988,13.775
  Bottom Layer w0.2: v2(18.7,23) 19.097,22.603 19.097,19.203 v2(19.7,18.6)
D_2_N: D2.3 J5.A7 J5.B7 | length 6.4
  Top Layer w0.2: v1@25.792,5.582 J5.B7@25.792,6.605 ; v1(26.792,5.535) J5.A7@26.792,6.605 26.792,7.628 27.496,8.332 D2.3@27.496,9.575
  Bottom Layer w0.2: v1@25.769,5.535 v1(26.792,5.535)
  other v1: 25.792,5.535
D_2_P: D2.1 J5.A6 J5.B6 | length 8.5
  Top Layer w0.2: D2.1@25.596,9.575 25.596,8.324 26.292,7.628 J5.A6@26.292,6.605 26.292,4.514 26.409,4.397 27.172,4.397 27.292,4.517 J5.B6@27.292,6.605
D_N: D1.1 J1.A7 J1.B7 | length 4.9
  Top Layer w0.2: D1.1@11.146,9.575 11.146,9.553 11.146,8.148 11.342,7.952 11.342,7.696 11.342,7.675 ; J1.B7@11.342,6.555 11.342,7.675 ; J1.A7@12.342,6.715 12.342,7.325 11.992,7.675 11.342,7.675
D_P: D1.3 J1.A6 J1.B6 | length 5.2
  Top Layer w0.2: J1.A6@11.842,6.25 11.842,5.717 11.959,5.6 12.667,5.6 12.842,5.775 J1.B6@12.842,6.25 ; J1.B6@12.842,6.555 12.842,7.944 13.046,8.148 D1.3@13.046,9.575